# EAGLE board JAZ_NEW_PARTS (EAGLE 4.09)

Size 160 x 100 mm. Coordinates in mm from the lower left corner, seen from the top.
Outline: 0,0 160,0 160,100 0,100 0,0
Copper layers used: 

## Footprints (pad centres in the part's own frame; a part is rotated, then mirrored left to right if it is on the bottom)
DIL08-4 = drill 0.813 round: 1 -3.81,-3.81; 2 3.81,-3.81; 3 3.81,3.81; 4 -3.81,3.81
SG51 = drill 0.813 round: 1 -7.62,-3.81; 7 7.62,-3.81; 8 7.62,3.81; 14 -7.62,3.81
DIL_SOCKET8A4 = drill 0.813 offset: 1 -3.81,-3.81; 4 3.81,-3.81; 5 3.81,3.81; 8 -3.81,3.81
DIL_SOCKET14A4 = drill 0.813 offset: 1 -7.62,-3.81; 7 7.62,-3.81; 8 7.62,3.81; 14 -7.62,3.81
DIL04 = drill 0.813 offset: 1 -1.27,-3.81; 2 1.27,-3.81; 3 1.27,3.81; 4 -1.27,3.81
DIL14/4 = drill 0.813 offset: 1 -7.62,-3.81; 7 7.62,-3.81; 8 7.62,3.81; 14 -7.62,3.81
DIL14/8 = drill 0.813 offset: 1 -7.62,-3.81; 2 -5.08,-3.81; 6 5.08,-3.81; 7 7.62,-3.81; 8 7.62,3.81; 9 5.08,3.81; 13 -5.08,3.81; 14 -7.62,3.81
DIL16/4 = drill 0.813 offset: 1 -8.89,-3.81; 8 8.89,-3.81; 9 8.89,3.81; 16 -8.89,3.81
DIL16/8 = drill 0.813 offset: 1 -8.89,-3.81; 2 -6.35,-3.81; 7 6.35,-3.81; 8 8.89,-3.81; 9 8.89,3.81; 10 6.35,3.81; 15 -6.35,3.81; 16 -8.89,3.81
DIL_SOCKET14A8 = drill 0.813 offset: 1 -7.62,-3.81; 2 -5.08,-3.81; 6 5.08,-3.81; 7 7.62,-3.81; 8 7.62,3.81; 9 5.08,3.81; 13 -5.08,3.81; 14 -7.62,3.81
DIL24-3/12 = drill 0.813 offset: 1 -13.97,-3.81; 2 -11.43,-3.81; 3 -8.89,-3.81; 10 8.89,-3.81; 11 11.43,-3.81; 12 13.97,-3.81; 13 13.97,3.81; 14 11.43,3.81; 15 8.89,3.81; 22 -8.89,3.81; 23 -11.43,3.81; 24 -13.97,3.81
DIL_SOCKET16A4 = drill 0.813 offset: 1 -8.89,-3.81; 8 8.89,-3.81; 9 8.89,3.81; 16 -8.89,3.81
DIL_SOCKET16A8 = drill 0.813 offset: 1 -8.89,-3.81; 2 -6.35,-3.81; 7 6.35,-3.81; 8 8.89,-3.81; 9 8.89,3.81; 10 6.35,3.81; 15 -6.35,3.81; 16 -8.89,3.81
DIL_SOCKET24A12 = drill 0.813 pad 1.6 octagon: 1 -13.97,-3.81; 2 -11.43,-3.81; 3 -8.89,-3.81; 10 8.89,-3.81; 11 11.43,-3.81; 12 13.97,-3.81; 13 13.97,3.81; 14 11.43,3.81; 15 8.89,3.81; 22 -8.89,3.81; 23 -11.43,3.81; 24 -13.97,3.81
NME = drill 0.813 long: 1 0,3.81; 2 0,1.27; 3 0,-1.27; 4 0,-3.81
NMA = drill 0.813 long: 1 0,6.35; 2 0,3.81; 4 0,-1.27; 5 0,-3.81; 6 0,-6.35
NMA-D = drill 0.813 offset: 1 -7.62,-3.81; 7 7.62,-3.81; 8 7.62,3.81; 9 5.08,3.81; 11 0,3.81; 14 -7.62,3.81

## Placement (x,y rotation side)
E$1  SG51 - 4.OOMhz  [DIL08-4]  23.49,43.65 0 top
E$2  SG531 - 4.00Mhz  [SG51]  19.68,25.87 0 top
E$3  DIL_SOCKET8A4  [DIL_SOCKET8A4]  47.62,43.65 0 top
E$4  DIL_SOCKET14A4  [DIL_SOCKET14A4]  113.66,90.64 0 top
E$5  DIP4  [DIL04]  34.92,61.43 0 top
E$6  DIL14/4  [DIL14/4]  89.53,90.64 0 top
E$7  DIL14/8  [DIL14/8]  89.53,72.86 0 top
E$8  DIL16/4  [DIL16/4]  88.26,55.08 0 top
E$9  DIL16/8  [DIL16/8]  88.26,37.3 0 top
E$10  DIL_SOCKET14A8  [DIL_SOCKET14A8]  113.66,72.86 0 top
E$11  DIL24-3/12  [DIL24-3/12]  83.18,19.52 0 top
E$12  DIL_SOCKET16A4  [DIL_SOCKET16A4]  114.93,55.08 0 top
E$13  DIL_SOCKET16A8  [DIL_SOCKET16A8]  114.93,37.3 0 top
E$14  DIL_SOCKET24A12  [DIL_SOCKET24A12]  120.01,19.52 0 top
E$15  DIL_SOCKET14A4  [DIL_SOCKET14A4]  51.43,25.87 0 top
E$16  NME 1205S  [NME]  19.68,90.64 90 top
E$17  NMA 1205S  [NMA]  50.16,94.45 90 top
E$18  NMA 1205D  [NMA-D]  51.43,75.4 0 top

## Library data of the parts
E$1 E$2 = crystal
E$3 E$4 E$10 E$12-E$15 = MY_SOCKET
E$5-E$9 = dil
E$11 = burr-brown
E$16 E$17 = dc-dc-converter
E$18 = STEPPER 2